# EAGLE board source_eagle (EAGLE 9.4.1)
REV: C
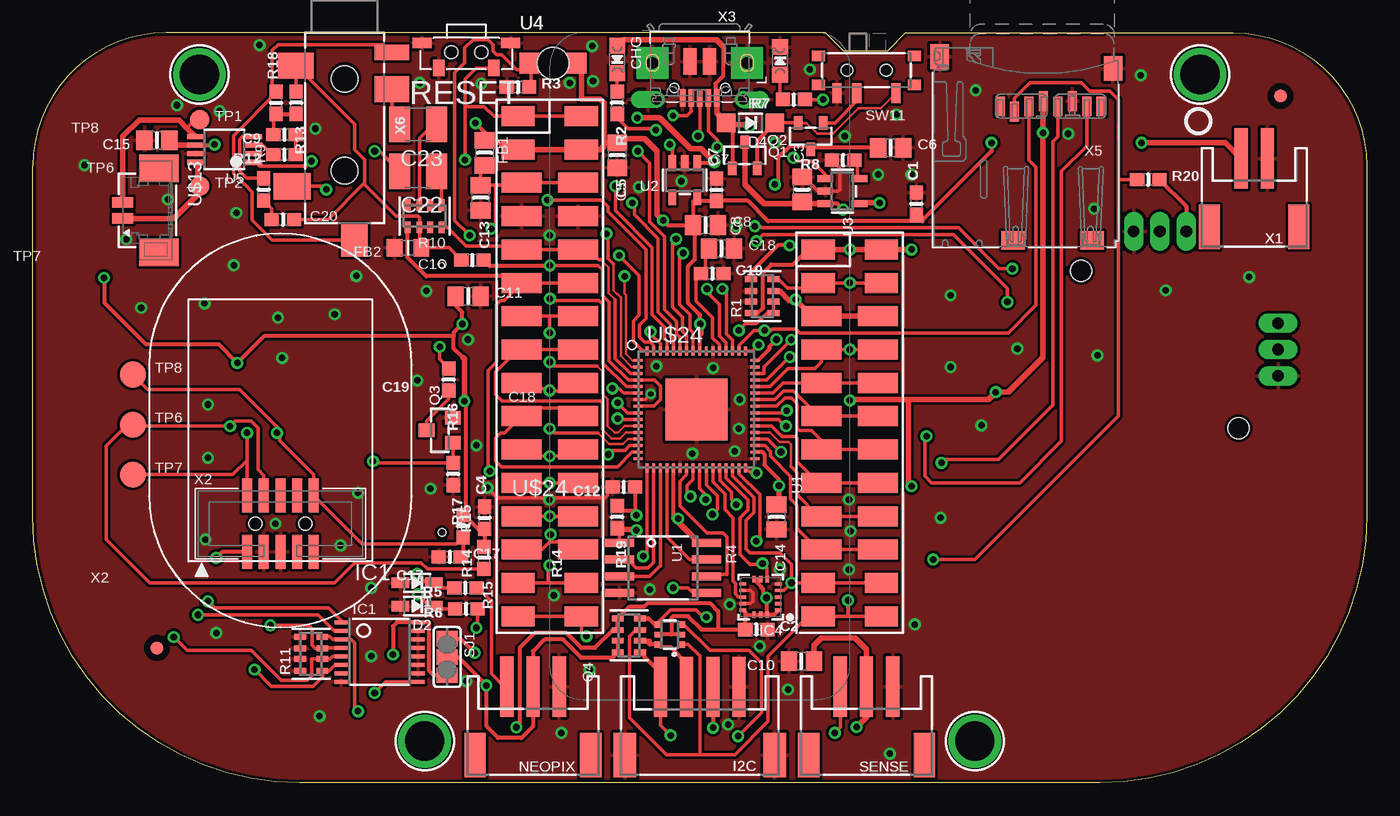
[diagram p0: board, top side]
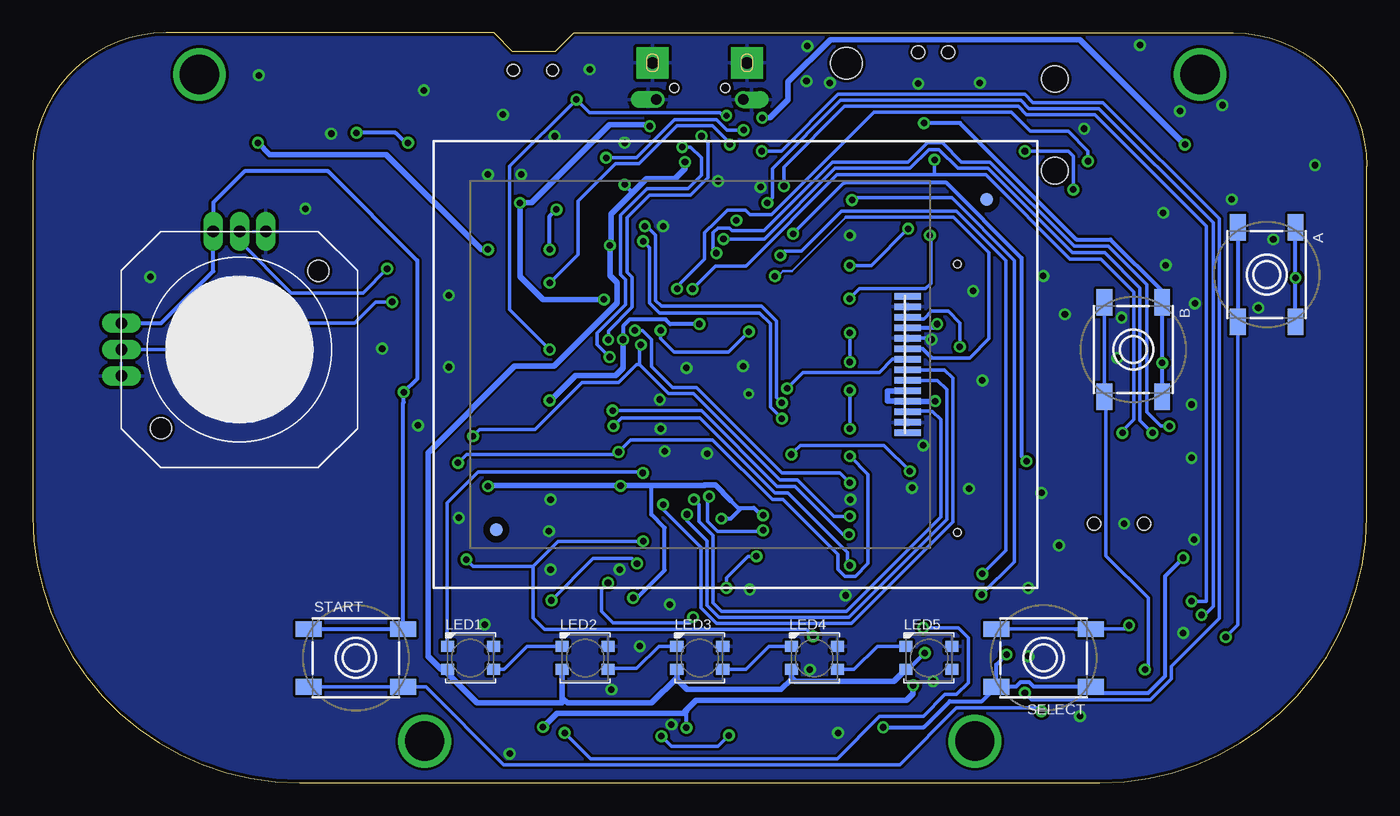
[diagram p1: board, bottom side, seen from below]

Size 101.6 x 57.15 mm. Coordinates in mm from the lower left corner, seen from the top.
Outline: 60.39,57.15 10.16,57.15 arc90 0,46.99 0,20.32 arc90 20.32,0 81.28,0 arc90 101.6,20.32 101.6,46.99 arc90 91.44,57.15 66.48,57.15 65.09,55.75 61.79,55.75 60.39,57.15
Copper layers (1*16): Top 0.035mm / dielectric 1.5mm / Bottom 0.035mm
Design rules "adafruit *": minimum track width 8mil, minimum drill 15.5mil, track to track 8mil, track to pad 8mil, pad to pad 8mil, via to via 8mil, smd to smd 8mil, copper to edge 10mil, drill to drill 8mil, minimum pad ring 10mil, minimum via ring 8mil, stop-mask expansion 2mil, vias tented up to drill 20mil, thermal gap 10mil
Net classes: 1 power: width 0.305 mm; 2 gnd: width 0.254 mm

## Footprints (pad centres in the part's own frame; a part is rotated, then mirrored left to right if it is on the bottom)
6MM_SMT_6MMCAP = smd 2 x 1.2: A -3.6,-2.2; A' 3.6,-2.2; B -3.6,2.2; B' 3.6,2.2
0603-NO = smd 1.075 x 1: 1 -0.85,0; 2 0.85,0
0805-NO = smd 1.24 x 1.5: 1 -0.95,0; 2 0.95,0
C1210 = smd 1.6 x 2.7: 1 -1.4,0; 2 1.4,0
CHIPLED_0805_NOOUTLINE = smd 1.2 x 1.2: A 0,-1.05; C 0,1.05
SOD-323 = smd 1.35 x 0.8: A 1.27,0; C -1.27,0
SOD-123 = smd 1.4 x 1.4: A 1.85,0; C -1.85,0
_0805MP = smd 1.2 x 1.3: 1 -1.016,0; 2 1.016,0
JSTPH4 = smd 1 x 4.6: 1 -3,-3.7; 2 -1,-3.7; 3 1,-3.7; 4 3,-3.7 | smd 1.7 x 3.4: NC1 -5.7,1.5; NC2 5.7,1.5
TSSOP16 = smd 0.305 x 0.991: 1 -2.275,-2.918; 2 -1.625,-2.918; 3 -0.975,-2.918; 4 -0.325,-2.918; 5 0.325,-2.918; 6 0.975,-2.918; 7 1.625,-2.918; 8 2.275,-2.918; 9 2.275,2.918; 10 1.625,2.918; 11 0.975,2.918; 12 0.325,2.918; 13 -0.325,2.918; 14 -0.975,2.918; 15 -1.625,2.918; 16 -2.275,2.918
LGA16_3X3MM = smd 0.5 x 0.25: 1 -1.35,1; 2 -1.35,0.5; 3 -1.35,0; 4 -1.35,-0.5; 5 -1.35,-1; 9 1.35,-1; 10 1.35,-0.5; 11 1.35,0; 12 1.35,0.5; 13 1.35,1 | smd 0.25 x 0.5: 6 -0.5,-1.35; 7 0,-1.35; 8 0.5,-1.35; 14 0.5,1.35; 15 0,1.35; 16 -0.5,1.35
JOYSTICK_ANALOG_MINITHM = drill 0.9 pad 1.5 long: X 0,9; X+ 2,9; X- -2,9; Y 9,0; Y+ 9,2; Y- 9,-2 | hole 1.6: -6,6; 6,-6
JD-T1800 = smd 0.5 x 2: 1 5.2,-13.1; 2 4.4,-13.1; 3 3.6,-13.1; 4 2.8,-13.1; 5 2,-13.1; 6 1.2,-13.1; 7 0.4,-13.1; 8 -0.4,-13.1; 9 -1.2,-13.1; 10 -2,-13.1; 11 -2.8,-13.1; 12 -3.6,-13.1; 13 -4.4,-13.1; 14 -5.2,-13.1 | hole 0.6: -12.8,-16.9; 7.65,-16.9
LED3535 = smd 1 x 0.85: 1 -1.75,0.875; 2 -1.75,-0.875; 3 1.75,-0.875; 4 1.75,0.875
FEATHERWING_SMT_NOHOLES = smd 1.524 x 2.54: 1 6.35,2.413; 1B 6.35,-2.413; 2 8.89,2.413; 2B 8.89,-2.413; 15 41.91,2.413; 15B 41.91,-2.413; 16 44.45,2.413; 16B 44.45,-2.413; 17 44.45,20.447; 17B 44.45,25.273; 18 41.91,20.447; 18B 41.91,25.273; 27 19.05,20.447; 27B 19.05,25.273; 28 16.51,20.447; 28B 16.51,25.273 | smd 1.524 x 3.048: 3 11.43,2.159; 3B 11.43,-2.159; 4 13.97,2.159; 4B 13.97,-2.159; 5 16.51,2.159; 5B 16.51,-2.159; 6 19.05,2.159; 6B 19.05,-2.159; 7 21.59,2.159; 7B 21.59,-2.159; 8 24.13,2.159; 8B 24.13,-2.159; 9 26.67,2.159; 9B 26.67,-2.159; 10 29.21,2.159; 10B 29.21,-2.159; 11 31.75,2.159; 11B 31.75,-2.159; 12 34.29,2.159; 12B 34.29,-2.159; 13 36.83,2.159; 13B 36.83,-2.159; 14 39.37,2.159; 14B 39.37,-2.159; 19 39.37,20.701; 19B 39.37,25.019; 20 36.83,20.701; 20B 36.83,25.019; 21 34.29,20.701; 21B 34.29,25.019; 22 31.75,20.701; 22B 31.75,25.019; 23 29.21,20.701; 23B 29.21,25.019; 24 26.67,20.701; 24B 26.67,25.019; 25 24.13,20.701; 25B 24.13,25.019; 26 21.59,20.701; 26B 21.59,25.019
JSTPH3 = smd 1 x 4.6: 1 -2,-2.7; 2 0,-2.7; 3 2,-2.7 | smd 1.6 x 3.4: NC1 -4.4,2.5; NC2 4.4,2.5
SOT23-R = smd 0.635 x 1.016: 1 -0.95,-1; 2 0.95,-1; 3 0,1
SOT23-WIDE = smd 1 x 1.2: 1 -0.95,-1; 2 0.95,-1; 3 0,1
SOT363 = smd 0.5 x 0.5: 1 -0.75,-0.9; 3 0.75,-0.9; 4 0.75,0.9; 6 -0.75,0.9 | smd 0.4 x 0.5: 2 0,-0.9; 5 0,0.9
RESPACK_4X0603 = smd 0.45 x 0.9: 1 -1.3,-0.85; 2 -0.4,-0.85; 3 0.4,-0.85; 4 1.3,-0.85; 5 1.3,0.85; 6 0.4,0.85; 7 -0.4,0.85; 8 -1.3,0.85
SPST_TACTILE_RA = smd 0.9 x 1.27: 1 -2.1,0.9; 2 2.1,0.9 | smd 1.45 x 0.8: MT1 -3.375,-1; MT2 3.375,-1 | hole 1: -1.15,-0.3; 1.15,-0.3
SOLDERJUMPER_2WAY_OPEN_NOPASTE = smd 1.168 x 1.6: 1 -1.397,0; 2 0,0; 3 1.397,0
SPDT_SMT_SSSS811101 = smd 0.7 x 1.5: A -2.25,1.75; B 0.75,1.75; C 2.25,1.75 | smd 1 x 0.8: SUP1 -3.65,1.1; SUP2 -3.65,-1.1; SUP3 3.65,1.1; SUP4 3.65,-1.1 | hole 0.9: -1.5,0; 1.5,0
TESTPOINT_ROUND_1.5MM_NO = smd 1.5 x 1.5: P$1 0,0
TESTPOINT_ROUND_2MM_NO = smd 2 x 2: P$1 0,0
SOIC8_208MIL = smd 0.6 x 2.2: 1 -1.905,-3.315; 2 -0.635,-3.315; 3 0.635,-3.315; 4 1.905,-3.315; 5 1.905,3.315; 6 0.635,3.315; 7 -0.635,3.315; 8 -1.905,3.315
SOT23-5 = smd 0.55 x 1.2: 1 -0.95,-1.3; 2 0,-1.3; 3 0.95,-1.3; 4 0.95,1.3; 5 -0.95,1.3
ALS-PT26-21C = smd 1.5 x 1.6: 1_E -1.8,0; 2_C 1.8,0 | hole 2.4: 0,0
MSOP8_0.65MM = smd 0.4 x 1.3: 1 -0.975,-2.2; 2 -0.325,-2.2; 3 0.325,-2.2; 4 0.975,-2.2; 5 0.975,2.2; 6 0.325,2.2; 7 -0.325,2.2; 8 -0.975,2.2
MOUNTINGHOLE_3.0_PLATEDTHIN = drill 3 pad 3.6: P$1 0,0
53398-0271 = smd 0.8 x 1.6: 1 0.625,-1.27; 2 -0.625,-1.27 | smd 2.1 x 3: M1 3.185,1.48; M2 -3.185,1.48
PQFN64-1 = smd 0.7 x 0.22: 1 -4.45,3.75; 2 -4.45,3.25; 3 -4.45,2.75; 4 -4.45,2.25; 5 -4.45,1.75; 6 -4.45,1.25; 7 -4.45,0.75; 8 -4.45,0.25; 9 -4.45,-0.25; 10 -4.45,-0.75; 11 -4.45,-1.25; 12 -4.45,-1.75; 13 -4.45,-2.25; 14 -4.45,-2.75; 15 -4.45,-3.25; 16 -4.45,-3.75; 33 4.45,-3.75; 34 4.45,-3.25; 35 4.45,-2.75; 36 4.45,-2.25; 37 4.45,-1.75; 38 4.45,-1.25; 39 4.45,-0.75; 40 4.45,-0.25; 41 4.45,0.25; 42 4.45,0.75; 43 4.45,1.25; 44 4.45,1.75; 45 4.45,2.25; 46 4.45,2.75; 47 4.45,3.25; 48 4.45,3.75 | smd 0.22 x 0.7: 17 -3.75,-4.45; 18 -3.25,-4.45; 19 -2.75,-4.45; 20 -2.25,-4.45; 21 -1.75,-4.45; 22 -1.25,-4.45; 23 -0.75,-4.45; 24 -0.25,-4.45; 25 0.25,-4.45; 26 0.75,-4.45; 27 1.25,-4.45; 28 1.75,-4.45; 29 2.25,-4.45; 30 2.75,-4.45; 31 3.25,-4.45; 32 3.75,-4.45; 49 3.75,4.45; 50 3.25,4.45; 51 2.75,4.45; 52 2.25,4.45; 53 1.75,4.45; 54 1.25,4.45; 55 0.75,4.45; 56 0.25,4.45; 57 -0.25,4.45; 58 -0.75,4.45; 59 -1.25,4.45; 60 -1.75,4.45; 61 -2.25,4.45; 62 -2.75,4.45; 63 -3.25,4.45; 64 -3.75,4.45 | smd 4.7 x 4.7: EXP 0,0
FIDUCIAL_1MM = smd 1 x 1: 1 0,0
JSTPH2 = smd 1 x 4.6: 1 -1,-3.7; 2 1,-3.7 | smd 1.6 x 3.4: NC1 -3.4,1.5; NC2 3.4,1.5
2X05_1.27MM_BOX_POSTS = smd 0.76 x 2.6: 1 -2.54,-2.15; 2 -2.54,2.15; 3 -1.27,-2.15; 4 -1.27,2.15; 5 0,-2.15; 6 0,2.15; 7 1.27,-2.15; 8 1.27,2.15; 9 2.54,-2.15; 10 2.54,2.15 | hole 1: -1.905,0; 1.905,0
4UCONN_20329_V2 = smd 1 x 2: BASE@1 -0.75,-2; BASE@2 0.75,-2 | smd 0.4 x 1.35: D+ 0,0.775; D- -0.65,0.775; GND 1.3,0.775; ID 0.65,0.775; VBUS -1.3,0.775 | drill 0.8 pad 1.143 offset: SPRT@1 -3.3,0.9; SPRT@2 3.3,0.9 | drill 0.9 pad 2.413 square: SPRT@3 -3.6,-1.9; SPRT@4 3.6,-1.9 | hole 0.7: -1.95,0; 1.95,0
MICROSD = smd 0.7 x 1.5: 1 9,-10.64; 2 7.9,-10.24; 3 6.8,-10.64; 4 5.7,-11.04; 5 4.6,-10.64; 6 3.5,-11.04; 7 2.4,-10.64; 8 1.3,-10.64 | smd 1.8 x 1.4: CD1 2,-0.44; CD2 8,-0.44 | smd 1.4 x 1.9: MT1 0.4,-13.54; MT2 13.6,-14.44
4UCONN_19269 = smd 2 x 2.7: 1 2.5,-3.7 | smd 2 x 2.8: 2 11.7,-4 | smd 2 x 2.6: 3 4.3,3.6 | smd 2.5 x 2: 4 15.8,0.75 | smd 1.2 x 2.6: 5 1.5,3.6 | hole 2: 3.5,0; 10.5,0

## Placement (x,y rotation side)
A  [6MM_SMT_6MMCAP]  7.62,38.73 270 bottom
B  [6MM_SMT_6MMCAP]  17.78,33.02 270 bottom
C1  1uF  [0603-NO]  67.31,44.13 90 top
C2  1uF  [0603-NO]  55.12,11.68 0 top
C3  10µF  [0805-NO]  58.61,45.21 90 top
C4  1uF  [0603-NO]  34.42,20.19 90 top
C5  10uF  [0805-NO]  44.51,47.82 270 top
C6  10µF  [0805-NO]  65.34,48.39 0 top
C7  1uF  [0603-NO]  52.09,45.2 90 top
C8  10µF  [0805-NO]  51.24,42.5 0 top
C9  1uF  [0603-NO]  19.18,49.4 180 top
C10  10uF  [0805-NO]  58.55,9.27 180 top
C11  10uF  [0805-NO]  33.16,37.08 0 top
C12  1uF  [0603-NO]  45.02,22.54 180 top
C13  10uF  [0805-NO]  34.1,44.58 270 top
C14  10uF  [0805-NO]  56.64,20.26 270 top
C15  10uF  [0805-NO]  9.46,48.96 180 top
C16  1uF  [0603-NO]  33.49,39.83 180 top
C17  0.1uF  [0603-NO]  31.75,17.21 0 top
C18  10uF  [0805-NO]  52.45,40.7 0 top
C19  1uF  [0603-NO]  51.75,38.8 0 top
C20  1uF  [0603-NO]  19.05,42.93 0 top
C22  100uF  [C1210]  29.34,46.61 180 top
C23  100uF  [C1210]  29.34,50.16 180 top
CHG  ORANGE  [CHIPLED_0805_NOOUTLINE]  44.51,55.12 180 top
D1  3.6V  [SOD-323]  29.27,15.24 180 top
D2  3.6V  [SOD-323]  29.27,13.46 180 top
D4  MBR0540  [SOD-123]  54.67,50.29 180 top
FB1  Ferrite  [0805-NO]  34.42,48.01 270 top
FB2  Ferrite  [_0805MP]  28.57,40.77 180 top
I2C  JST PH 4  [JSTPH4]  50.8,3.62 180 top
IC1  74165TSSOP  [TSSOP16]  26.42,9.97 270 top
IC4  LIS3DH  [LGA16_3X3MM]  55.44,14.16 180 top
JOY1  JOYSTICK_ANALOG_XY  [JOYSTICK_ANALOG_MINITHM]  85.85,33.02 90 bottom
L  RED  [CHIPLED_0805_NOOUTLINE]  56.92,55.01 0 top
LCD1  DISP_LCD_JDT1800  [JD-T1800]  48.07,31.88 90 bottom
LED1  WS2812B3535  [LED3535]  68.26,9.52 0 bottom
LED2  WS2812B3535  [LED3535]  59.53,9.52 0 bottom
LED3  WS2812B3535  [LED3535]  50.8,9.52 0 bottom
LED4  WS2812B3535  [LED3535]  42.07,9.52 0 bottom
LED5  WS2812B3535  [LED3535]  33.34,9.52 0 bottom
MS1  FEATHERWING_SMTDUALNOHOLES  [FEATHERWING_SMT_NOHOLES]  39.37,57.15 270 top
NEOPIX  JST PH 3  [JSTPH3]  38.1,4.64 180 top
Q1  DMG2305  [SOT23-R]  54.23,47.82 0 top
Q2  DMG2305  [SOT23-R]  59.25,49.28 180 top
Q3  BSS138  [SOT23-WIDE]  31,26.87 90 top
Q4  BSS138  [SOT363]  48.51,11.3 90 top
R1  100K  [RESPACK_4X0603]  55.56,37.08 90 top
R2  1K  [0603-NO]  44.51,51.82 270 top
R3  10K  [0603-NO]  36.96,53.02 0 top
R4  10K  [RESPACK_4X0603]  45.4,11.24 270 top
R5  1K  [0603-NO]  32.96,14.86 180 top
R6  1K  [0603-NO]  33.02,13.27 180 top
R7  2.2K  [0603-NO]  57.98,52.07 180 top
R8  4.7K  [0603-NO]  61.72,47.43 180 top
R9  100  [0603-NO]  17.59,45.21 90 top
R10  100  [RESPACK_4X0603]  29.84,43.18 180 top
R11  100K  [RESPACK_4X0603]  21.21,9.84 90 top
R12  100  [0603-NO]  19.18,47.88 180 top
R13  2.2K  [0603-NO]  20.07,51.82 270 top
R14  10K  [0603-NO]  32.77,19.56 270 top
R15  10K  [0603-NO]  34.35,17.14 270 top
R16  10  [0603-NO]  31.69,30.73 270 top
R17  100K  [0603-NO]  32.03,23.53 270 top
R18  2.2K  [0603-NO]  18.54,51.82 90 top
R19  100K  [0603-NO]  44.51,20.26 270 top
R20  10K  [0603-NO]  84.96,45.97 0 top
RESET  [SPST_TACTILE_RA]  33.02,55.37 180 top
SELECT  [6MM_SMT_6MMCAP]  24.61,9.52 180 bottom
SENSE  JST PH 3  [JSTPH3]  63.5,4.64 180 top
SJ1  [SOLDERJUMPER_2WAY_OPEN_NOPASTE]  31.56,9.59 270 top
START  [6MM_SMT_6MMCAP]  76.99,9.52 0 bottom
SW11  [SPDT_SMT_SSSS811101]  63.5,54.29 180 top
TP1  [TESTPOINT_ROUND_1.5MM_NO]  12.7,50.55 0 top
TP2  [TESTPOINT_ROUND_1.5MM_NO]  12.7,45.47 0 top
TP6  [TESTPOINT_ROUND_2MM_NO]  7.62,27.3 0 top
TP7  [TESTPOINT_ROUND_2MM_NO]  7.62,23.49 0 top
TP8  [TESTPOINT_ROUND_2MM_NO]  7.62,31.11 0 top
U1  GD25Q64  [SOIC8_208MIL]  48.01,16.38 270 top
U2  AP2112-3.3  [SOT23-5]  49.66,45.91 180 top
U3  MCP73831T-2ACI/OT  [SOT23-5]  61.66,45.09 270 top
U4  ALS-PT21  [ALS-PT26-21C]  39.62,54.84 0 top
U5  PAM8302AASCR  [MSOP8_0.65MM]  14.6,48.26 90 top
U$5  MOUNTINGHOLE3.0THIN  [MOUNTINGHOLE_3.0_PLATEDTHIN]  12.7,53.97 0 top
U$6  MOUNTINGHOLE3.0THIN  [MOUNTINGHOLE_3.0_PLATEDTHIN]  71.75,3.18 0 top
U$8  [SPEAKER_OVAL8OHM]  18.86,26.86 90 top
U$13  CON_MOLEX_2P  [53398-0271]  8.13,43.62 270 top
U$17  MOUNTINGHOLE3.0THIN  [MOUNTINGHOLE_3.0_PLATEDTHIN]  29.84,3.18 0 top
U$18  MOUNTINGHOLE3.0THIN  [MOUNTINGHOLE_3.0_PLATEDTHIN]  88.9,53.97 0 top
U$24  ATSAMD51J19  [PQFN64-1]  50.55,28.45 0 top
U$34  FIDUCIAL_1MM  [FIDUCIAL_1MM]  9.46,10.29 270 top
U$35  FIDUCIAL_1MM  [FIDUCIAL_1MM]  95.04,52.33 270 top
U$37  [PCBFEAT-REV-040]  88.77,50.42 0 top
U$43  FIDUCIAL_1MM  [FIDUCIAL_1MM]  28.96,44.45 0 bottom
U$46  FIDUCIAL_1MM  [FIDUCIAL_1MM]  66.29,19.3 0 bottom
U$47  [PYGAMER_BACK]  0,0 0 top
U$48  [PYGAMER_FRONT]  101.6,0 0 bottom
X1  JSTPH  [JSTPH2]  93.03,43.88 180 top
X2  2x5 0.05" SWD  [2X05_1.27MM_BOX_POSTS]  18.86,19.75 0 top
X3  microUSB  [4UCONN_20329_V2]  50.8,52.96 180 top
X5  MicroSD  [MICROSD]  82.68,40.89 180 top
X6  [4UCONN_19269]  23.75,57.15 270 top

## Library data of the parts
A B C1-C7 C9-C20 CHG D1 D2 D4 FB1 FB2 I2C IC1 IC4 JOY1 L LCD1 LED1-LED5 MS1 NEOPIX Q1-Q4 R1-R20 RESET SELECT SENSE SJ1 START SW11 TP1 TP2 TP6-TP8 U1-U5 U$8 U$13 U$24 U$37 X1-X3 X5 X6 = microbuilder
C8 = microbuilder; COMPANY: ADAFRUIT INDUSTRIES; DRAWN: KTOWN; REV: C
C22 C23 = resistor
U$5 U$6 U$17 U$18 U$34 U$35 U$43 U$46 = microbuilder; BOM: EXCLUDE
U$47 U$48 = feather_silks

## Nets
!RESET: C17.2 MS1.1 MS1.1B R14.2 RESET.1 TP8.P$1 U$24.52 X2.10
+3V3 [power]: A.B A.B' B.B B.B' C1.1 C2.1 C4.1 C5.1 C7.1 C8.1 C11.1 C12.1 C14.1 FB1.1 IC1.16 IC4.1 IC4.7 IC4.8 IC4.13 IC4.14 IC4.15 IC4.16 JOY1.X+ JOY1.Y+ LCD1.4 LCD1.10 LCD1.11 MS1.2 MS1.2B Q4.2 Q4.5 R4.1 R4.2 R14.1 R15.1 R19.1 R20.2 SELECT.B SELECT.B' SJ1.3 START.B START.B' U1.8 U2.5 U4.2_C U$24.21 U$24.34 U$24.48 U$24.56 X2.1 X5.4
A0: MS1.5 MS1.5B R10.8 U$24.3
A1: MS1.6 MS1.6B R10.5 U$24.14
A2: MS1.7 MS1.7B U$24.11
A3: MS1.8 MS1.8B U$24.12
A4: MS1.9 MS1.9B U$24.13
A5: MS1.10 MS1.10B U$24.15
A6_VMEAS: R1.1 R1.2 U$24.62
A7_LIGHT: R3.2 U4.1_E U$24.5
AGND: C16.2 C20.2 FB2.1 R10.6 R10.7 R13.1 X6.1
AVCC: C13.1 C16.1 FB1.2 MS1.3 MS1.3B U$24.4 U$24.8
BUTTON4: IC1.3 R11.4 START.A START.A'
BUTTON5: IC1.4 R11.3 SELECT.A SELECT.A'
BUTTON6: A.A A.A' IC1.5 R11.2
BUTTON7: B.A B.A' IC1.6 R11.1
BUTTON_CLK: IC1.2 U$24.60
BUTTON_LATCH: IC1.1 U$24.61
BUTTON_OUT: IC1.9 U$24.59
CHG_LED: R2.2 U3.1
CHG_RATE: R8.1 U3.5
D2_: NEOPIX.3 R5.1
D2_A8: D1.C R5.2 U$24.64
D3_: R6.1 SENSE.3
D3_A9: D2.C R6.2 U$24.63
D4_SDCS: MS1.16 MS1.16B R20.1 U$24.31 X5.2
D5: MS1.19 MS1.19B U$24.35
D6: MS1.20 MS1.20B U$24.37
D7_LISIRQ: IC4.11 U$24.27
D8_NEOPIX: LED1.1 U$24.32
D9: MS1.21 MS1.21B U$24.38
D10: MS1.22 MS1.22B U$24.41
D11: MS1.23 MS1.23B U$24.42
D12: MS1.24 MS1.24B U$24.43
D13_JACDAC: MS1.25 MS1.25B R7.1 U$24.44 X3.ID
D+: U$24.46 X3.D+
D-: U$24.45 X3.D-
EN: MS1.27 MS1.27B R1.4 U2.3
GND: C1.2 C2.2 C3.2 C4.2 C5.2 C6.2 C7.2 C8.2 C10.2 C11.2 C12.2 C13.2 C14.2 C15.2 C17.1 C18.2 C19.2 D1.A D2.A FB2.2 I2C.1 I2C.NC1 I2C.NC2 IC1.8 IC1.10 IC1.11 IC1.12 IC1.13 IC1.14 IC1.15 IC4.5 IC4.10 IC4.12 JOY1.X- JOY1.Y- L.C LCD1.2 LCD1.5 LCD1.13 LED1.4 LED2.4 LED3.4 LED4.4 LED5.4 MS1.4 MS1.4B NEOPIX.1 Q3.2 R1.6 R1.7 R3.1 R8.2 R11.5 R11.6 R11.7 R11.8 R17.2 RESET.2 RESET.MT1 RESET.MT2 SENSE.1 SW11.C U1.4 U2.2 U3.2 U5.7 U$24.7 U$24.22 U$24.33 U$24.47 U$24.54 U$24.EXP X1.1 X2.3 X2.5 X3.BASE@1 X3.BASE@2 X3.GND X3.SPRT@1 X3.SPRT@2 X3.SPRT@3 X3.SPRT@4 X5.6 X5.MT1 X5.MT2
JOYX: JOY1.X U$24.10
JOYY: JOY1.Y U$24.9
LEDK: LCD1.3 R16.1
MISO: MS1.13 MS1.13B U$24.49 X5.7
MOSI: MS1.12 MS1.12B U$24.50 X5.3
N$1: CHG.C R2.1
N$2: L.A R7.2
N$3: LED1.3 LED2.1
N$4: LED2.3 LED3.1
N$5: LED3.3 LED4.1
N$6: Q3.3 R16.2
N$7: LED4.3 LED5.1
N$8: D4.C Q1.2 Q2.2 SW11.A
N$9: R9.2 U5.4
N$10: R12.2 U5.3
N$12: C23.2 X6.3
N$13: C9.2 R13.2 R18.1
N$14: C22.2 X6.2
N$15: C23.1 R10.3 R10.4
N$16: C20.1 R9.1
N$17: C9.1 R12.1
N$70: C22.1 R10.1 R10.2
ON/OFF: Q2.1 SW11.B
QSPI_CS: R19.2 U1.1 U$24.24
QSPI_DATA[0]: U1.5 U$24.17
QSPI_DATA[1]: U1.2 U$24.18
QSPI_DATA[2]: U1.3 U$24.19
QSPI_DATA[3]: U1.7 U$24.20
QSPI_SCK: U1.6 U$24.23
RX: MS1.14 MS1.14B U$24.40
SCK: MS1.11 MS1.11B U$24.36 X5.5
SCL: I2C.4 Q4.3 R4.5
SCL_3V: IC4.4 MS1.18 MS1.18B Q4.4 R4.8 U$24.30
SDA: I2C.3 Q4.6 R4.6
SDA_3V: IC4.6 MS1.17 MS1.17B Q4.1 R4.7 U$24.29
SPEAKER_IN: R18.2 X6.4 X6.5
SPKR+: TP1.P$1 U5.5 U$13.2
SPKR-: TP2.P$1 U5.8 U$13.1
SPKR_EN: U5.1 U$24.51
SWCLK: R15.2 TP6.P$1 U$24.57 X2.4
SWDIO: TP7.P$1 U$24.58 X2.2
TFT_CS: LCD1.12 U$24.25
TFT_DC: LCD1.7 U$24.6
TFT_LITE: Q3.1 R17.1 U$24.2
TFT_MOSI: LCD1.8 U$24.28
TFT_RST: LCD1.6 U$24.1
TFT_SCK: LCD1.9 U$24.26
TX: MS1.15 MS1.15B U$24.39
V+ [power]: C6.1 C15.1 LED1.2 LED2.2 LED3.2 LED4.2 LED5.2 Q2.3 R1.5 SJ1.1 U2.1 U5.6
VBAT [power]: C3.1 MS1.28 MS1.28B Q1.3 R1.8 U3.3 X1.2
VBUS: CHG.A D4.A MS1.26 MS1.26B Q1.1 R1.3 U3.4 X3.VBUS
VCC [power]: C10.1 I2C.2 NEOPIX.2 R4.3 R4.4 SENSE.2 SJ1.2
VDDCORE2: C18.1 C19.1 U$24.53

## Tracks (layer width: path | path; a pad name or v marks a point on that pad's centre or on a via)
!RESET  (via drill 0.5)
  Top 0.254: v51.35,37.64 51.23,37.51 52.31,36.43 52.31,34.06 52.8,33.57 U$24.52 | MS1.1 MS1.1B 35.12,50.8 34.38,51.53 33.01,51.53 32.92,51.44 | TP8.P$1 8.76,29.97 15.75,29.97 18.67,27.05 18.67,26.73 v18.61,26.67 18.8,26.48 18.8,26.1 21.4,23.49 X2.10 25.1,18.2 32.26,18.2 R14.2 | 32.92,51.44 v32.92,47.48 | RESET.1 33.77,54.47 32.92,53.62 32.92,51.44
  Top 0.305: R14.2 32.77,17.38 C17.2
  Bottom 0.254: 32.96,46.34 40.34,46.34 47.29,39.39 49.6,39.39 v51.35,37.64 | v32.92,47.48 32.92,46.38 32.96,46.34 | v18.61,26.67 18.61,26.8 17.73,27.67 17.73,37.41 20.24,39.93 22.6,39.93 29.01,46.34 32.96,46.34
+3V3  (via drill 0.5)
  Top 0.305: 48.8,23.62 48.8,20.13 v49.15,20.13 | U$24.34 55.57,25.2 55.71,25.06 55.71,24.23 56.83,23.11 v56.83,22.63 | U$24.56 50.8,34.04 50.92,34.17 50.92,34.86 v50.82,34.96 50.82,35.66 49.91,36.58 49.91,39.37 50.42,39.88 50.42,42.37 C8.1 | R15.1 34.42,18.06 C4.1 33.93,19.34 33.13,20.14 | v56.64,33.78 56.1,33.24 56.1,33.05 55.25,32.2 U$24.48 | v32.87,29.08 32.97,28.98 32.97,20.3 33.13,20.14 | 33.13,20.14 33.01,20.02 32.75,20.27 32.75,20.4 R14.1 | MS1.2B 36,48.26 35.31,48.96 FB1.1 | FB1.1 34.42,49.58 v33.72,50.27 | 32.07,34.04 32.07,34.31 v32.71,34.96 32.71,35.87 32.21,36.38 C11.1 | 32.77,32.41 32.07,33.1 32.07,34.04 | C12.1 45.87,20.49 v45.97,20.38 45.63,20.73 44.89,20.73 R19.1 | 32.07,34.04 17.61,34.04 v15.58,32 14.18,33.4 8.64,33.4 5.46,36.58 5.46,38.44 v5.42,38.48 | X2.1 14.42,17.6 v13.97,17.14 | IC4.15 IC4.14 54.43,12.81 IC4.13 54.27,12.98 C2.1 52.2,11.68 | IC4.15 55.88,12.81 v55.88,14.1 55.63,14.1 55.63,14.75 55.5,14.88 55.5,14.95 IC4.8 IC4.7 | IC4.15 IC4.16 56.44,12.81 IC4.1 | Q4.2 48.64,11.3 | 48.64,11.3 Q4.5 | v27.43,9.78 27.43,11.94 27.74,12.24 IC1.16 30.05,12.24 30.18,12.11 30.18,8.55 30.54,8.19 SJ1.3 | 48.64,11.3 48.64,12.57 48.77,12.7 49.91,12.7 50.93,11.68 52.2,11.68 | v48.01,42.86 48.37,42.5 C8.1 | C8.1 50.29,44.29 U2.5 50.87,44.35 C7.1 54.46,44.35 56.01,42.8 67.79,42.8 67.54,43.05 | 67.54,43.05 67.94,43.05 73.03,48.13 v73.03,48.77 | C1.1 67.54,43.05 | 52.2,11.68 52.2,13.08 51.56,13.72 46.85,13.72 46.57,13.44 45.45,13.44 R4.1 R4.2 44.15,11.64 42.8,10.29 41.78,10.29 40.64,11.43 38.23,11.43 37.08,10.29 37.08,4.49 v36.83,4.24 | FB1.1 | U4.2_C 41.67,54.84 41.8,54.72
  Top 0.305: 48.8,23.62 | 48.8,23.62 U$24.21 | R20.2 87.85,43.94 JOY1.Y+
  Top 0.406: MS1.2B MS1.2 43.24,48.26 43.5,48.51 43.5,48.77 | U1.8 50.74,18.29 49.15,19.88 v49.15,20.13 | 43.5,48.77 43.5,51.81 43.2,52.11 41.8,52.11 41.8,54.72 | 43.5,48.77 C5.1 44.83,49.08 46.61,49.08 47.56,48.13 47.56,43.31 v48.01,42.86 | v62.23,29.15 62.28,29.2 66.7,29.2 | 66.7,29.2 72.77,29.2 v73.34,29.77 74.3,29.77 76.95,32.41 v76.95,49.53 76.95,51.29 76.98,51.32 X5.4 | v32.87,29.08 32.87,32.3 32.77,32.41 | C14.1 56.83,21.4 v56.83,22.63 | 66.7,29.2 66.7,22.83 v66.93,22.61
  Bottom 0.305: v56.64,33.78 56.64,34.8 56.13,35.31 53.4,35.31 53.06,34.96 v50.82,34.96 | LCD1.4 32.71,34.68 v32.71,34.96 | B.B' v15.58,32 B.B 15.58,37.46 19.52,41.4 22.1,41.4 30.97,50.27 v33.72,50.27 | START.B START.B' 73.39,28.97 73.34,29.02 v73.34,29.77 72.33,30.79 72.33,39.81 79.12,46.61 85.47,46.61 87.85,44.23 JOY1.Y+ 87.85,38.99 91.82,35.02 JOY1.X+ | A.B' v5.42,38.48 A.B | v13.97,17.14 15.37,15.75 15.37,8.13 16.66,6.83 20.51,6.83 SELECT.B 25.36,7.32 25.7,7.67 26.37,7.67 26.71,7.32 SELECT.B' | v36.83,4.24 33.73,4.24 31.75,6.22 29.31,6.22 SELECT.B' | v55.88,14.1 55.56,14.1 53.47,16.19 53.47,19.43 54.48,20.45 54.48,22.67 | 48.45,21.53 47.88,20.95 | 47.88,20.95 47.75,20.83 48.45,20.13 v49.15,20.13 | v73.03,48.77 73.22,48.77 73.98,49.53 v76.95,49.53 | 47.88,20.95 46.67,20.95 46.1,20.38 v45.97,20.38 | SELECT.B' 28.21,9 v27.43,9.78
  Bottom 0.406: v62.23,29.15 62.17,29.15 60.26,31.05 57.21,31.05 56.64,31.62 v56.64,33.78 | LCD1.10 36.51,29.88 36.51,29.08 LCD1.11 v32.88,29.08 v32.87,29.08 | v56.83,22.63 56.79,22.67 | 56.79,22.67 54.48,22.67 50.45,22.67 50.44,22.69 49.61,22.69 48.45,21.53 | v66.93,22.61 66.86,22.67 56.79,22.67
A0
  Top 0.203: 43.23,39.89 43.84,39.28 43.84,37.34 44.36,36.81
  Top 0.254: U$24.3 45.51,31.2 44.36,32.35 44.36,36.81 | 43.23,39.89 43.1,39.89 42.35,40.64 MS1.5 MS1.5B 36.96,40.89 32.99,40.89 31.56,42.33 R10.8
A1  (via drill 0.5)
  Top 0.254: MS1.6 MS1.6B 35.88,36.77 35.62,36.77 35.31,36.45 35.31,32.07 34.67,31.43 34.67,23.88 v34.8,23.75 | U$24.14 45.45,25.7 45.09,25.34 44.14,25.34 v43.82,25.02
  Top 0.305: MS1.6B 36.7,38.61 29.97,38.61 28.54,40.03 R10.5
  Bottom 0.254: v34.8,23.75 36.77,25.72 43.12,25.72 43.57,25.28 | v43.82,25.02 43.57,25.28 | 43.57,25.28
A2  (via drill 0.5)
  Top 0.203: U$24.11 45.08,27.2 44.57,26.69 44.3,26.69 43.79,27.2 43.79,29.26 43.4,29.65 43.4,31.34 42.99,31.75
  Top 0.254: 39.37,35.56 MS1.7B | MS1.7 39.37,35.56 | 42.99,31.75 39.69,31.75 v39.37,32.07 | 39.37,35.56 v39.37,34.29
  Bottom 0.254: v39.37,34.29 v39.37,32.07
A3
  Top 0.203: 43.24,29.08 43.37,28.96 43.37,26.98 44.09,26.25 44.71,26.25 45.17,26.71 46.08,26.71 U$24.12
  Top 0.254: MS1.8 MS1.8B 36.96,33.02 35.24,31.31 35.24,29.59 35.75,29.08 43.24,29.08
A4  (via drill 0.5)
  Top 0.203: 43.05,26.67 43.91,25.82 44.95,25.82 45.33,26.2 U$24.13
  Top 0.254: MS1.9 40.89,29.84 39.43,29.84 v39.37,29.91 39.37,30.04 37.66,30.04 MS1.9B | 43.05,26.67 39.69,26.67 v39.37,26.99
  Bottom 0.254: v39.37,29.91 v39.37,26.99
A5
  Top 0.254: MS1.10 40.89,28.57 37.85,28.57 MS1.10B 35.94,26.67 35.62,26.67 35.24,26.29 35.24,24.51 35.69,24.07 | U$24.15 45.65,25.2 44.52,24.07 35.69,24.07 | 35.69,24.07
A6_VMEAS  (via drill 0.5)
  Top 0.254: R1.2 R1.1 55.9,35.78 55.11,34.99 54.29,34.99 v53.78,34.48 | U$24.62 47.8,33.47 47.06,34.21 v47.06,34.38
  Bottom 0.254: v47.06,34.38 48.61,32.83 52.77,32.83 53.78,33.85 v53.78,34.48
A7_LIGHT  (via drill 0.5)
  Top 0.254: U$24.5 45.22,30.2 43.45,31.97 43.45,36.44 43.12,36.77 39.52,36.77 v39.39,36.9 | R3.2 37.93,53.15 37.93,54.36 37.17,54.36 36.83,54.36 35.69,55.5 35.31,55.5 35.05,55.75 35.05,56.26 34.67,56.64 33.53,56.64 32.89,56.01 32.89,54.86 32.13,54.11 32.13,42.86 v33.27,41.72
  Top 0.305: U4.1_E 37.82,54.38 37.84,54.36 37.17,54.36
  Bottom 0.254: v33.27,41.72 33.21,41.66 33.21,38.06 33.61,37.66 38.63,37.66 v39.39,36.9
AGND
  Top 0.254: R10.7 R10.6 | R10.6 29.44,43.07 29.34,43.18 27.69,43.18 25.27,45.59 25.27,45.72 | 25.27,45.72 25.27,47.5 24.51,48.26 24.51,50.19 X6.1 20.05,52.68 R13.1 | C16.2 31.7,40.77 FB2.1 29.44,40.91 R10.6 | C20.2 22.48,42.93 25.27,45.72
AVCC  (via drill 0.5)
  Top 0.254: MS1.3 MS1.3B 37.02,45.53 35.24,45.53 | v39.38,39.43 v39.37,39.43 43.04,39.43 43.38,39.09 43.38,37.15 43.9,36.63 43.9,32.16 45.36,30.7 U$24.4 47.34,30.7 47.81,30.23 47.81,29.21 47.31,28.7 U$24.8 | FB1.2 34.1,46.74 C13.1 35.24,45.53 | 35.24,45.53 35.24,42.55 v34.92,42.23
  Top 0.305: v39.37,39.43 39.31,39.37 34.8,39.37 C16.1
  Bottom 0.254: v39.38,39.43 37.72,39.43 v34.92,42.23
BUTTON4  (via drill 0.5)
  Top 0.254: R11.4 22.09,11.18 22.61,11.18 22.84,10.94 IC1.3 24.23,10.94 24.51,10.67 24.51,5.71 v24.76,5.46
  Bottom 0.254: START.A START.A' 71.66,7.32 65.73,1.4 35.56,1.4 31.24,5.71 24.76,5.71 v24.76,5.46
BUTTON5  (via drill 0.5)
  Top 0.254: IC1.4 22.11,10.29 R11.3 21.51,10.24 21.27,10.48 21.27,11.75 21.02,12 v18.1,12
  Bottom 0.254: 22.22,11.72 22.22,11.68 22.27,11.72 SELECT.A' | SELECT.A 18.37,11.72 v18.1,12
  Bottom 0.305: 22.22,11.72 SELECT.A
BUTTON6  (via drill 0.5)
  Top 0.254: v10.73,11.11 11.75,10.1 16.65,10.1 18.92,7.82 20.91,7.82 21.24,8.16 21.24,9.44 R11.2 22.65,9.44 22.85,9.64 IC1.5
  Bottom 0.254: v10.73,11.11 9.82,12.02 9.82,34.8 9.82,35.05 9.82,42.03
  Bottom 0.305: A.A 9.82,35.05 | A.A' 9.82,34.8
BUTTON7  (via drill 0.5)
  Top 0.254: v16.89,8.64 18.16,7.37 21.34,7.37 22.06,8.09 R11.1 22.58,8.54 23.03,8.99 IC1.6
  Bottom 0.254: B.A B.A' 19.85,29.29 19.85,17.31 16.64,14.1 16.64,8.89 v16.89,8.64
BUTTON_CLK  (via drill 0.5)
  Top 0.254: v45.66,44.2 45.82,44.03 45.82,43.29 47.64,41.48 47.64,35.86 48.58,34.92 48.58,34.02 48.8,33.81 U$24.60 | IC1.2 22.95,11.59 21.74,12.81 v12.57,12.81
  Bottom 0.254: v12.57,12.81 12.34,12.81 11.68,13.46 11.68,42.67 20.4,51.38 25.72,51.38 26.34,52.01 40.07,52.01 45.28,46.8 45.28,44.58 v45.66,44.2
BUTTON_LATCH  (via drill 0.5)
  Top 0.254: v44.39,45.47 44.39,43.59 47.18,40.8 47.18,35.67 48.13,34.73 48.13,33.83 48.3,33.66 U$24.61 | v13.33,13.84 13.84,13.33 22.53,13.33 23.5,12.37 IC1.1
  Bottom 0.254: v44.39,45.47 44.39,46.93 39.76,51.55 26.53,51.55 25.91,50.93 20.71,50.93 12.22,42.44 12.22,13.84 v13.33,13.84
BUTTON_OUT  (via drill 0.5)
  Top 0.254: U$24.59 49.3,33.96 49.04,34.21 49.04,35.17 48.13,36.08 48.13,41.63 46.98,42.78 46.98,47.23 v46.08,48.13 | IC1.9 26.87,7.69 v26.03,6.86
  Bottom 0.254: v46.08,48.13 44.59,48.13 40.26,52.46 26.05,52.46 25.42,51.84 20.09,51.84 11.23,42.98 11.23,12.52 14.88,8.86 14.88,7.93 16.46,6.35 25.53,6.35 v26.03,6.86
CHG_LED  (via drill 0.5)
  Top 0.254: R2.2 44.51,50.67 45.34,49.85 47.36,49.85 v47.46,49.75 | U3.1 60.36,46.34 59.33,47.37 58.18,47.37 v57.93,47.62
  Bottom 0.254: v47.46,49.75 48.73,49.75 49.53,50.55 52.7,50.55 55.63,47.62 v57.93,47.62
CHG_RATE
  Top 0.254: U3.5 62.83,46.17 62.83,47.18 R8.1
D2_
  Top 0.254: R5.1 33.93,14.86 34.95,13.84 34.95,8.3 35.91,7.34 NEOPIX.3
D2_A8  (via drill 0.5)
  Top 0.254: U$24.64 46.48,32.9 45.74,33.63 45.74,35.2 46.19,35.64 46.19,38.67 v44.66,40.2 | R5.2 30.92,14.86 D1.C 29.97,15.24 v29.27,15.94
  Bottom 0.254: v44.66,40.2 44.35,40.5 43.06,40.5 39.99,43.57 31.24,43.57 27.48,39.81 27.48,17.73 v29.27,15.94
D3_  (via drill 0.5)
  Top 0.254: R6.1 33.87,11.9 v33.78,11.81 | SENSE.3 61.5,4.22 v61.09,3.81
  Bottom 0.254: v61.09,3.81 59.13,1.85 40.32,1.85 37.1,5.08 33.78,5.08 32.13,6.73 31.24,6.73 30.35,7.62 30.35,11.05 31.11,11.81 v33.78,11.81
D3_A9  (via drill 0.5)
  Top 0.254: U$24.63 47.3,33.33 47.04,33.58 46.59,33.58 46.21,33.96 46.21,34.9 46.71,35.39 46.71,40.63 43.8,43.53 43.8,43.91 43.31,44.41 v39.2,44.41 | R6.2 30.73,13.27 D2.C 30.23,13.46 v29.34,14.35
  Bottom 0.254: v39.2,44.41 39.03,44.58 31.6,44.58 26.83,39.81 26.83,16.85 v29.34,14.35
D4_SDCS  (via drill 0.5)
  Top 0.254: v55.12,18.41 55.37,18.67 55.37,21.97 53.8,23.55 U$24.31 | v68.58,17.02 71.75,17.02 82.68,27.94 82.68,45.97 | 82.68,45.97 82.68,52.07 82.04,52.7 80.52,52.7 79.88,53.34 75.95,53.34 74.78,52.17 X5.2 | R20.1 82.68,45.97 | MS1.16B MS1.16 41.78,11.56 v42.16,11.18
  Bottom 0.254: v42.16,11.18 42.67,11.68 62.61,11.68 63.5,12.57 63.5,16.51 | 63.5,16.51 61.59,18.41 v55.12,18.41 | 63.5,16.51 68.07,16.51 v68.58,17.02
D5
  Top 0.254: U$24.35 55.77,25.7 56.2,25.27 56.2,24.89 57.72,23.37 57.72,21.65 58.22,21.16 58.22,19.38 59.82,17.78 MS1.19 MS1.19B
D6
  Top 0.203: U$24.37 56.13,26.7 56.86,25.97 57.56,25.97 57.76,25.77 57.76,24.12
  Top 0.254: MS1.20B MS1.20 59.86,20.32 58.22,21.96 58.22,23.66 57.76,24.12
D7_LISIRQ
  Top 0.254: U$24.27 51.8,22.98 51.84,22.94 51.84,22.9 52.7,22.04 52.7,20.83 53.34,20.19 53.34,15.38 53.5,15.21 53.5,14.4 53.72,14.18 53.72,14.16 IC4.11
D8_NEOPIX  (via drill 0.5)
  Top 0.254: U$24.32 54.81,23.48 54.94,23.62 v55.13,23.62
  Bottom 0.254: v55.13,23.62 55.2,23.68 67.7,23.68 70.04,21.34 70.04,10.4 LED1.1
D9
  Top 0.254: MS1.21B MS1.21 59.86,22.86 58.22,24.5 58.22,26.29 58.1,26.4 57.06,26.4 56.26,27.2 U$24.38
D10
  Top 0.254: MS1.22B MS1.22 60.07,26.09 59.31,26.85 58.41,26.85 58.22,27.04 58.22,28.9 57.78,29.34 57.3,29.34 56.66,28.7 U$24.41
D11
  Top 0.254: MS1.23B MS1.23 59.86,27.94 57.95,29.84 57.16,29.84 56.52,29.2 U$24.42
D12
  Top 0.254: MS1.24B MS1.24 57.15,30.48 56.37,29.7 55.24,29.7 U$24.43 | U$24.43
D13_JACDAC  (via drill 0.45, 0.5)
  Top 0.254: MS1.25B v62.23,33.02 MS1.25 60.07,32.08 59.56,31.57 57.52,31.57 56.15,30.2 U$24.44 | v60.2,52.07 R7.1 | v48.76,50.85 49.83,50.85 50.16,51.18 50.15,51.2 X3.ID
  Bottom 0.254: v62.23,33.02 65.28,36.07 65.28,46.99 v60.2,52.07 59.18,51.05 49.26,51.05 49.06,50.85 v48.76,50.85
D+  (via drill 0.5)
  Top 0.254: v50.67,49.28 50.8,49.41 X3.D+ | v57.76,33.76 55.68,31.67 55.68,31.2 U$24.46
  Bottom 0.254: v50.67,49.28 50.16,48.77 50.16,46.11 51.5,44.77 54.61,44.77 56.32,43.05 56.32,38.93 55.94,38.54 55.94,36.24 57.76,34.41 v57.76,33.76
D-  (via drill 0.5)
  Top 0.254: v57.66,32.45 57.63,32.45 55.88,30.7 U$24.45 | X3.D- 51.45,49.64 52.13,48.96 v52.13,48.45
  Bottom 0.254: v52.13,48.45 51.5,48.45 50.67,47.62 50.67,46.29 51.69,45.28 54.8,45.28 56.45,43.62 56.83,43.24 56.83,38.73 56.45,38.35 56.45,36.44 58.61,34.28 58.61,33.4 v57.66,32.45
EN  (via drill 0.5)
  Top 0.254: MS1.27B v62.23,38.1 MS1.27 59.4,37.69 57.49,37.69 56.79,38.38 | R1.4 56.79,38.38 | 56.79,38.38 | 56.79,38.38 | U2.3 48.71,48.45 v48.51,48.64
  Bottom 0.254: v48.51,48.64 48.51,48.76 49.85,50.09 52.52,50.09 55.44,47.17 57.23,47.17 60.07,44.32 60.07,40.26 v62.23,38.1
GND  (via drill 0.39, 0.5)
  Top 0.254: C12.2 43.79,22.16 43.79,21.91 43.6,21.72 35.39,21.72 v34.63,22.48 | U$24.7 46.62,29.2 v47.07,29.64 | IC4.10 54.68,14.66 54.86,14.48 54.86,13.84 54.68,13.66 IC4.12 | C3.2 58.74,46.16 59.82,45.09 U3.2 61.34,45.09 61.47,45.21 61.47,46.84 R8.2
  Bottom 0.254: LCD1.5 33.05,33.88 v33.15,33.78
  other vias: 46.16,45.4 39.37,41.72 33.78,25.72 51.82,31.62 47.5,31.75 50.24,25.1 53.47,25.27 53.78,26.99 53.85,29.21 42.67,53.47 42.61,56.13 53.59,42.42 29.27,30.67 29.46,53.34 34.16,53.28 69.15,20.19 72.26,27.24 59.18,54.36 65.79,50.93 40.89,53.34 29.97,37.48 24.64,38.62 92.65,38.54 23.43,18.1 13.14,18.54 18.48,19.75 13.33,24.77 13.33,28.83 24.76,22.1 18.99,32.38 8.25,36.2 25.78,14.86 25.78,9.65 21.84,5.08 13.97,11.43 40.26,3.81 57.53,7.11 65.28,2.22 67.18,12.06 64.39,46.36 66.93,46.36 49.4,45.85 46.99,14.73 86.3,37.53 84.39,53.91 71.82,52.77 69.91,37.15 69.91,31.69 74.99,33.08 81.09,32.58 80.84,43.75 53.09,13.59 56.9,16.26 21.53,49.85 52.96,4.45 78.87,49.47 62.29,19.18 62.17,16.26 62.17,21.59 13.08,36.53 15.49,43.43 17.27,56.21 22.99,35.7 18.67,35.45 7.11,41.41 3.94,47.07 15.3,39.45 30.29,22.42 10.29,44.46 56.52,48.77 61.85,49.28 42.42,8.64 55.37,10.41 33.02,7.75 39.69,14.29 39.33,21.59 14.22,51.19 10.99,51.64
  pour Bottom: 0,57.15 101.6,57.15 101.6,0 0,0
  pour Top: 0,57.15 101.6,57.15 101.6,0 0,0
JOYX  (via drill 0.5)
  Top 0.254: U$24.10 44.61,27.7 | v55.12,41.27 55.63,41.78 70.1,41.78 74.23,37.66 v74.23,36.64
  Top 0.305: v44.55,27.76 44.61,27.7 | 44.61,27.7
  Bottom 0.254: v44.55,27.76 45.41,28.63 45.41,34.99 46.24,35.81 53.85,35.81 54.61,36.58 54.61,40.77 v55.12,41.27 | JOY1.X 88.39,33.02 86.36,35.05 77.09,35.05 75.5,36.64 v74.23,36.64
JOYY  (via drill 0.5)
  Top 0.254: U$24.9 45.3,28.2 v44.55,28.95 | v74.61,39.18 73.6,39.18 70.48,42.29 55.5,42.29 55.37,42.42 v54.99,42.42
  Bottom 0.254: v44.55,28.95 44.96,29.36 44.96,35.18 46.1,36.32 53.71,36.32 54.15,36.77 54.15,41.72 54.85,42.42 v54.99,42.42 | v74.61,39.18 76.45,37.34 81.91,37.34 85.85,41.27 JOY1.Y
LEDK  (via drill 0.5)
  Top 0.254: v30.99,33.23 30.99,32.28 R16.1
  Bottom 0.254: LCD1.3 34.84,35.35 33.74,35.35 33.15,35.94 31.88,35.94 30.99,35.05 v30.99,33.23
MISO  (via drill 0.5)
  Top 0.254: MS1.13B v39.37,20.32 MS1.13 | v55.29,33.38 54.8,32.9 U$24.49 | X5.7 80.28,48.53 78.36,46.61 78.36,26.04 75.18,22.86 68.45,22.86 67.94,23.37 67.94,26.29 v68.07,26.42
  Bottom 0.254: 55.37,31.88 53.16,29.67 51.27,29.67 44.7,23.09 43.35,23.09 40.58,20.32 v39.37,20.32 | v55.29,33.38 55.37,33.3 55.37,31.88 | 55.37,31.88 55.63,31.88 56.99,30.52 59.75,30.52 63.34,26.92 67.56,26.92 v68.07,26.42
MOSI  (via drill 0.5)
  Top 0.254: MS1.12B v39.37,22.86 MS1.12 | U$24.50 53.8,33.34 54.93,34.48 v55.73,34.48 56.23,34.48 56.32,34.56 58.14,34.56 58.42,34.29 74.3,34.29 76.41,36.41 76.41,46.9 75.88,47.44 X5.3
  Bottom 0.254: v55.73,34.48 55.16,34.48 54.47,33.79 54.47,31.74 52.86,30.12 51.03,30.12 44.53,23.62 40.13,23.62 v39.37,22.86
N$1
  Top 0.254: CHG.C 44.51,53.59 R2.1 | CHG.C
N$2
  Top 0.254: L.A 56.92,53.59 56.92,52.28 R7.2 | L.A
N$3
  Bottom 0.254: LED2.1 63.96,10.4 65.71,8.65 LED1.3
N$4
  Bottom 0.254: LED2.3 57.72,8.71 55.61,8.71 53.91,10.41 52.56,10.41 LED3.1
N$5
  Bottom 0.254: LED3.3 47.29,8.65 45.53,10.41 43.83,10.41 LED4.1
N$6
  Top 0.254: Q3.3 30,27.56 31.69,29.25 R16.2
N$7
  Bottom 0.254: LED4.3 39.04,8.65 37.27,10.41 35.1,10.41 LED5.1
N$8
  Top 0.203: Q2.2 58.94,50.28 59.57,49.65 59.57,49.64 59.75,49.46 60.96,49.46 62.89,51.4 64.61,51.4 SW11.A
  Top 0.254: Q2.2 58.29,50.29 D4.C
  Top 0.305: Q1.2 55.18,48.95 D4.C
N$9
  Top 0.254: U5.4 15.96,49.23 15.75,49.02 15.75,46.61 16.29,46.06 R9.2
N$10
  Top 0.254: U5.3 17.49,48.59 18.2,47.88 R12.2
N$11
  Top 0.305: 31.62,9.65 31.62,10.92
N$12
  Top 0.254: X6.3 27.35,50.75 C23.2
N$13
  Top 0.254: C9.2 18.33,50.75 R18.1
  Top 0.305: R18.1 R13.2
N$14  (via drill 0.5)
  Top 0.254: C22.2 26.41,48.13 v26.03,48.13 | X6.2 22.11,45.45 v22.35,45.21
  Bottom 0.254: v26.03,48.13 22.73,48.13 22.35,47.75 v22.35,45.21
N$15
  Top 0.254: R10.4 R10.3 29.44,49.13 30.48,50.16 C23.1
N$16
  Top 0.254: R9.1 18.2,43.75 C20.1
N$17
  Top 0.254: R12.1 C9.1
N$70
  Top 0.254: R10.2 R10.1 31.14,46.2 C22.1
ON/OFF
  Top 0.254: SW11.B 62.75,51.94 61.08,50.28 Q2.1
QSPI_CS  (via drill 0.5)
  Top 0.254: U$24.24 50.3,23.12 49.83,22.65 49.83,22.08 v50.08,21.83 | R19.2 45.81,19.41 v45.97,19.24 44.69,19.24 U1.1
  Bottom 0.254: v50.08,21.83 50.21,21.7 50.21,19.94 49.45,19.18 46.16,19.18 46.1,19.24 v45.97,19.24
QSPI_DATA[0]  (via drill 0.5)
  Top 0.254: U$24.17 46.8,17.46 46.61,17.27 v46.48,17.27 | U1.5 50.29,14.48 49.91,14.86 v48.77,14.86
  Bottom 0.254: v48.77,14.86 48.77,15.62 47.12,17.27 v46.48,17.27
QSPI_DATA[1]
  Top 0.254: U1.2 45.33,17.02 45.96,16.38 46.86,16.38 47.3,16.82 U$24.18
QSPI_DATA[2]
  Top 0.254: U1.3 46.99,15.75 47.75,16.51 47.8,16.55 U$24.19
QSPI_DATA[3]
  Top 0.254: U1.7 50.04,17.02 48.3,18.76 U$24.20
QSPI_SCK
  Top 0.254: U$24.23 49.8,23.49 49.28,22.97 49.28,21.11 51.34,19.05 52.56,19.05 52.88,18.73 52.88,15.87 51.44,15.87 U1.6
RX  (via drill 0.5)
  Top 0.254: MS1.14B 38.8,17.78 39.37,18.35 | MS1.14 40.96,18.35 39.37,18.35 | U$24.40 57.27,28.2 v57.43,28.36 | v39.43,18.92 39.43,18.41 39.37,18.35
  Bottom 0.254: v57.43,28.36 50.67,28.36 44.92,22.61 43.56,22.61 39.88,18.92 v39.43,18.92
SCK  (via drill 0.5)
  Top 0.254: MS1.11B 37.72,24.89 v39.37,24.89 41.02,24.89 MS1.11 | U$24.36 55.97,26.2 56.96,25.21 v56.99,25.21 | v69.22,24.38 69.47,24.64 73.53,24.64 77.7,28.8 77.7,48.87 78.08,49.25 X5.5
  Bottom 0.254: v39.37,24.89 37.97,23.49 37.97,16.71 38.93,15.75 39.75,15.75 40.25,16.26 40.25,17.39 44.45,21.59 45.28,21.59 49.83,26.14 56.06,26.14 v56.99,25.21 57.17,25.03 68.57,25.03 v69.22,24.38
SCL  (via drill 0.5)
  Top 0.254: v48.58,3.62 47.8,4.4 I2C.4 | v53.72,3.56 55.5,5.33 55.5,9.14 54.55,10.09 51.56,10.09 49.6,12.05 Q4.3 | I2C.4
  Top 0.305: I2C.4 47.8,8.39 R4.5
  Bottom 0.254: v53.72,3.56 52.96,2.79 49.4,2.79 v48.58,3.62
SCL_3V  (via drill 0.5)
  Top 0.254: U$24.30 53.3,23.38 54.91,21.76 54.91,20.61 54.3,20 54.3,17.83 54.61,17.53 56.9,17.53 57.78,16.64 v57.78,15.24 | IC4.4 57.2,14.66 v57.78,15.24 | MS1.18B MS1.18 v57.78,15.24 | v51.31,12.63 51.05,12.63 50.5,13.18 48.57,13.18 47.61,12.23 Q4.4
  Top 0.305: Q4.4 47.37,12.05 46.89,12.54 R4.8
  Bottom 0.254: v51.31,12.63 51.31,12.51 51.62,12.19 57.4,12.19 58.29,13.08 58.29,14.73 v57.78,15.24
SDA
  Top 0.305: I2C.3 49.8,9.13 48.6,10.33 47.83,10.33 Q4.6 46.98,10.55 46.85,10.68 47.01,10.84 R4.6
SDA_3V  (via drill 0.5)
  Top 0.254: MS1.17B 62.1,12.7 | 62.1,12.7 MS1.17 59.05,12.7 56.01,9.65 56.01,4.7 53.47,2.16 50.8,2.16 | U$24.29 52.8,23.24 54.46,21.57 54.46,20.8 53.85,20.19 53.85,17.4 54.61,16.64 55.68,16.64 | v62.1,13.91 62.1,12.7 | Q4.1 49.92,10.55 50.8,9.68 50.8,2.16 | R4.7 45.91,11.64 45.47,11.2 45.47,11.18 45.47,4.95 48.26,2.16 50.8,2.16 | 55.68,16.64 55.6,16.72 v55.58,16.72 | IC4.6 55.94,16.38 55.68,16.64
  Bottom 0.254: v62.1,13.91 58.91,17.1 55.96,17.1 v55.58,16.72
SPEAKER_IN
  Top 0.254: X6.4 18.21,41.35 16.7,42.86 16.7,45.02 16.12,45.61 16.11,45.61 15.29,46.42 15.29,49.33 18.54,52.58 R18.2 18.22,52.98 18.22,55.82 18.67,56.26 26.64,56.26 27.25,55.65 X6.5
SPKR+
  Top 0.254: 11.74,49.9 12.38,50.55 TP1.P$1
  Top 0.406: U5.5 11.74,49.9 11.13,50.5 8.09,50.5 6.86,49.28 U$13.2
SPKR-
  Top 0.254: TP2.P$1 12.57,45.47
  Top 0.406: U$13.1 10.74,43 12.57,44.83 12.57,45.47 12.57,47.12 U5.8
SPKR_EN  (via drill 0.5)
  Top 0.254: U$24.51 53.3,33.75 52.84,34.21 52.84,37.32 v52.52,37.64 | U5.1 16.98,47.28 17.27,46.99 20.85,46.99 v21.23,47.37
  Bottom 0.254: v52.52,37.64 52.52,37.83 50.42,39.93 50.42,41.92 49.61,42.73 49.59,42.73 48.68,43.65 47.33,43.65 46.99,43.31 45.33,43.31 37.54,51.09 27.07,51.09 25.63,49.66 22.73,49.66 21.23,48.15 v21.23,47.37
SWCLK  (via drill 0.5)
  Top 0.254: U$24.57 50.3,34.3 50.04,34.55 50.04,35.69 49.28,36.46 49.28,40.11 v49.53,40.36 | X2.4 17.59,23.42 17.14,23.87 17.14,27.03 16.62,27.56 15.41,27.56 v15.03,27.18 7.75,27.18 TP6.P$1 7.24,27.3 5.59,25.65 5.59,18.54 8.89,15.24 22.99,15.24 24.51,16.76 29.59,16.76 30.06,16.3 R15.2
  Bottom 0.254: v15.03,27.18 15.66,27.18 16.76,28.28 16.76,37.96 19.69,40.89 22.27,40.89 28.69,47.31 30.86,47.31 32.32,48.77 33.48,48.77 34.93,47.31 40.68,47.31 45.91,42.08 48.33,42.08 48.53,42.28 49.42,42.28 49.77,41.92 49.77,40.61 v49.53,40.36
SWDIO  (via drill 0.5)
  Top 0.254: U$24.58 49.8,34.1 49.5,34.4 49.5,35.48 48.74,36.24 48.74,41.19 v48.99,41.45 | v16.32,26.67 16.32,24.57 | 16.32,24.57 X2.2 | TP7.P$1 15.24,23.49 16.32,24.57
  Bottom 0.254: v48.99,41.45 45.88,41.45 40.5,46.82 34.78,46.82 33.34,48.26 32.58,48.26 31.14,46.82 28.85,46.82 22.41,40.39 19.94,40.39 17.27,37.72 17.27,27.62 v16.32,26.67
TFT_CS  (via drill 0.5)
  Top 0.254: U$24.25 50.8,22.42 51.24,21.97 v51.24,21.59
  Bottom 0.254: v51.24,21.59 50.86,21.21 50.86,19.94 49.78,18.86 49.78,13.72 49.15,13.08 39.62,13.08 32.45,20.26 32.45,27.69 33.06,28.3 33.2,28.3 33.22,28.32 34.93,28.32 LCD1.12
TFT_DC  (via drill 0.5)
  Top 0.254: U$24.6 45.02,29.7 44.93,29.78 44.65,30.06 v44.15,30.06
  Bottom 0.254: v44.15,30.06 42.95,31.27 37.12,31.27 36.11,32.28 LCD1.7
TFT_LITE  (via drill 0.5)
  Top 0.203: U$24.2 45.62,31.7 44.79,32.53 44.79,36.99 44.54,37.25 44.5,37.25 44.25,37.5 44.25,39.5 44.22,39.52
  Top 0.254: v43.69,41.85 43.81,41.72 43.81,39.93 44.22,39.52 | Q3.1 32,24.41 R17.1 26.04,24.38 v25.91,24.51
  Bottom 0.254: 39.81,45.72 v43.69,41.85
  Bottom 0.305: v25.91,24.51 26.29,24.89 26.29,40 32,45.72 39.81,45.72 | 39.81,45.72
TFT_MOSI  (via drill 0.5)
  Top 0.254: U$24.28 52.34,23.95 52.34,23.05 53.21,22.17 53.21,21.59 v53.59,21.21
  Bottom 0.254: 31.53,30.84 32.18,31.48 LCD1.8 | v53.59,21.21 53.59,20.83 50.7,17.93 50.7,13.34 49.53,12.17 39.24,12.17 31.53,19.88 31.53,30.84 | 31.53,30.84
TFT_RST  (via drill 0.5)
  Top 0.203: U$24.1 45.69,32.2 45.2,32.69 45.2,37.16 45.08,37.28 v45.08,38.61
  Bottom 0.203: 39.67,43.12 43.79,38.99 44.45,38.99 44.83,38.61 v45.08,38.61
  Bottom 0.254: LCD1.6 33.83,33.08 | 33.13,32.38 30.23,32.38 28.76,33.85 28.76,40.39 31.5,43.12 39.67,43.12
  Bottom 0.305: 33.83,33.08 33.13,32.38
TFT_SCK  (via drill 0.5)
  Top 0.254: v51.77,20.46 52.15,20.84 52.15,21.86 51.3,22.71 U$24.26
  Bottom 0.254: LCD1.9 32.71,30.68 31.99,29.96 31.99,20.07 39.43,12.62 49.34,12.62 50.24,13.53 50.24,18.42 51.77,19.95 v51.77,20.46
TX  (via drill 0.5)
  Top 0.254: 39.24,15.24 MS1.15B | MS1.15 39.24,15.24 | U$24.39 56.8,27.7 57.31,27.19 v57.38,27.19 | v39.37,16.57 39.24,16.45 39.24,15.24
  Bottom 0.254: v57.38,27.19 56.75,27.82 56.72,27.8 50.78,27.8 45.08,22.1 44.07,22.1 39.53,17.56 39.53,16.57 v39.37,16.57
V+  (via drill 0.5)
  Top 0.305: v57.64,40.96 56.75,40.96 54.69,38.9 54.71,38.89 R1.5 | C6.1 59.36,48.39 Q2.3 59.01,48.51 57.66,48.51 56.77,47.62 56.77,45.85 v56.52,45.59 | SJ1.1 32.58,10.98 v33.66,9.91 | v51.92,47.3 51.83,47.21 U2.1 | U5.6 13.79,48.59 v13.84,48.64
  Top 0.406: v46.04,50.67 47.75,50.67 50.11,48.32 50.91,48.32 v51.92,47.3 | U5.6 10.78,48.59 C15.1
  Bottom 0.305: LED5.2 34.91,8.65 v33.66,9.91 | v56.52,45.59 55.91,44.99
  Bottom 0.406: v51.92,47.3 51.92,46.79 52.68,46.03 54.87,46.03 55.91,44.99 57.57,43.33 57.57,41.02 v57.64,40.96 57.64,38.67 57.09,38.12 57.09,36.58 61.91,31.75 64.9,31.75 71.5,25.15 71.5,9.65 70.5,8.65 LED1.2 70.01,8.33 67.78,6.1 61.28,6.1 LED2.2 61.28,6.49 60.89,6.1 54.47,6.1 52.55,8.02 LED3.2 52.55,7.89 51.77,7.11 44.59,7.11 43.82,7.89 LED4.2 43.82,8.02 43.55,7.75 35.99,7.75 LED5.2 | v46.04,50.67 45.47,50.67 44.07,52.07 44.07,53.41 40.83,56.64 21.84,56.64 v13.84,48.64
VBAT  (via drill 0.5)
  Top 0.305: C3.1 58.61,44.2 58.67,44.13 | v61.72,43.69 61.27,44.13 U3.3 | R1.8 55.21,35.78 55.63,36.2 55.63,36.29 55.61,36.31 55.61,38.76 55.63,38.77 55.63,38.86 56.26,39.5 57.91,39.5 59.05,40.64 60.2,40.64
  Top 0.406: MS1.28 60.2,40.64 v62.23,40.64 MS1.28B v66.93,40.64 | v84.45,48.77 90.84,48.77 X1.2 | Q1.3 54.23,45.59 55.69,44.13 58.67,44.13 U3.3
  Bottom 0.305: v62.23,40.64 62.23,43.18 v61.72,43.69
  Bottom 0.406: v84.45,48.77 83.57,47.88 74.68,47.88 67.44,40.64 v66.93,40.64
VBUS  (via drill 0.5)
  Top 0.203: 51.99,53.27 51.99,52.92 52.04,52.88 52.04,52.7
  Top 0.254: X3.VBUS 52.1,52.82 51.99,52.92
  Top 0.305: D4.A 53.28,49.84 Q1.1 | 51.99,53.02 51.99,53.27 52.58,53.86 52.58,56.13 | MS1.26
  Top 0.406: R1.3 56.48,37.42 56.94,37.42 57.59,36.77 58.1,36.77 v58.1,36.83 59.37,35.56 MS1.26 MS1.26B | CHG.A 44.99,56.64 52.07,56.64 52.58,56.13 | X3.VBUS 52.1,51.02 D4.A 52.95,50.16 54.48,50.16 v54.61,50.04 | v64.5,44.2 63.02,44.2 U3.4
  Bottom 0.406: v54.61,50.04 54.74,50.16 57.66,50.16 63.63,44.2 v64.5,44.2 64.5,38.59 62.74,36.83 v58.1,36.83
VCC  (via drill 0.5)
  Top 0.305: R4.3 R4.4 44.14,9.52 41.78,9.52 40.39,10.92 38.99,10.92 38.1,10.03 NEOPIX.2 38.1,4.32 37.21,3.43 35.43,3.43 34.54,4.32 v34.54,7.43 32.38,9.59 SJ1.2 | I2C.2 51.8,4.23 v51.82,4.21
  Top 0.406: C10.1 59.5,10.47 60.07,11.05 62.61,11.05 63.5,10.16 SENSE.2 63.5,5.02 v62.74,4.25
  Bottom 0.305: v51.82,4.21 51.82,5.45
  Bottom 0.406: 51.93,5.45 52.05,5.32 61.67,5.32 v62.74,4.25 | 51.93,5.45 51.09,6.29 35.05,6.29 34.54,6.79 v34.54,7.43 | 51.93,5.45 51.82,5.45
VDDCORE2
  Top 0.254: U$24.53 52.3,33.39 51.78,33.91 51.78,35.47 50.52,36.73 50.52,38.42 C19.1 51.25,39.14 51.25,40.45 C18.1